# Altium PCB Copy of Testboard.PcbDoc (part 2 of 2)
Units mil, origin at the board's own origin, x right, y up, seen from the top; angles counter-clockwise.
Board outline 5500 x 5000 mil, 4 copper layers (Top layer, Inner Layer 1, Inner Layer 2, Bottom Layer), stack 13.956 mil thick; 71 components, 75 nets, 1162 pads, 400 vias.
Unrouted connection lines stored in the file: 379.
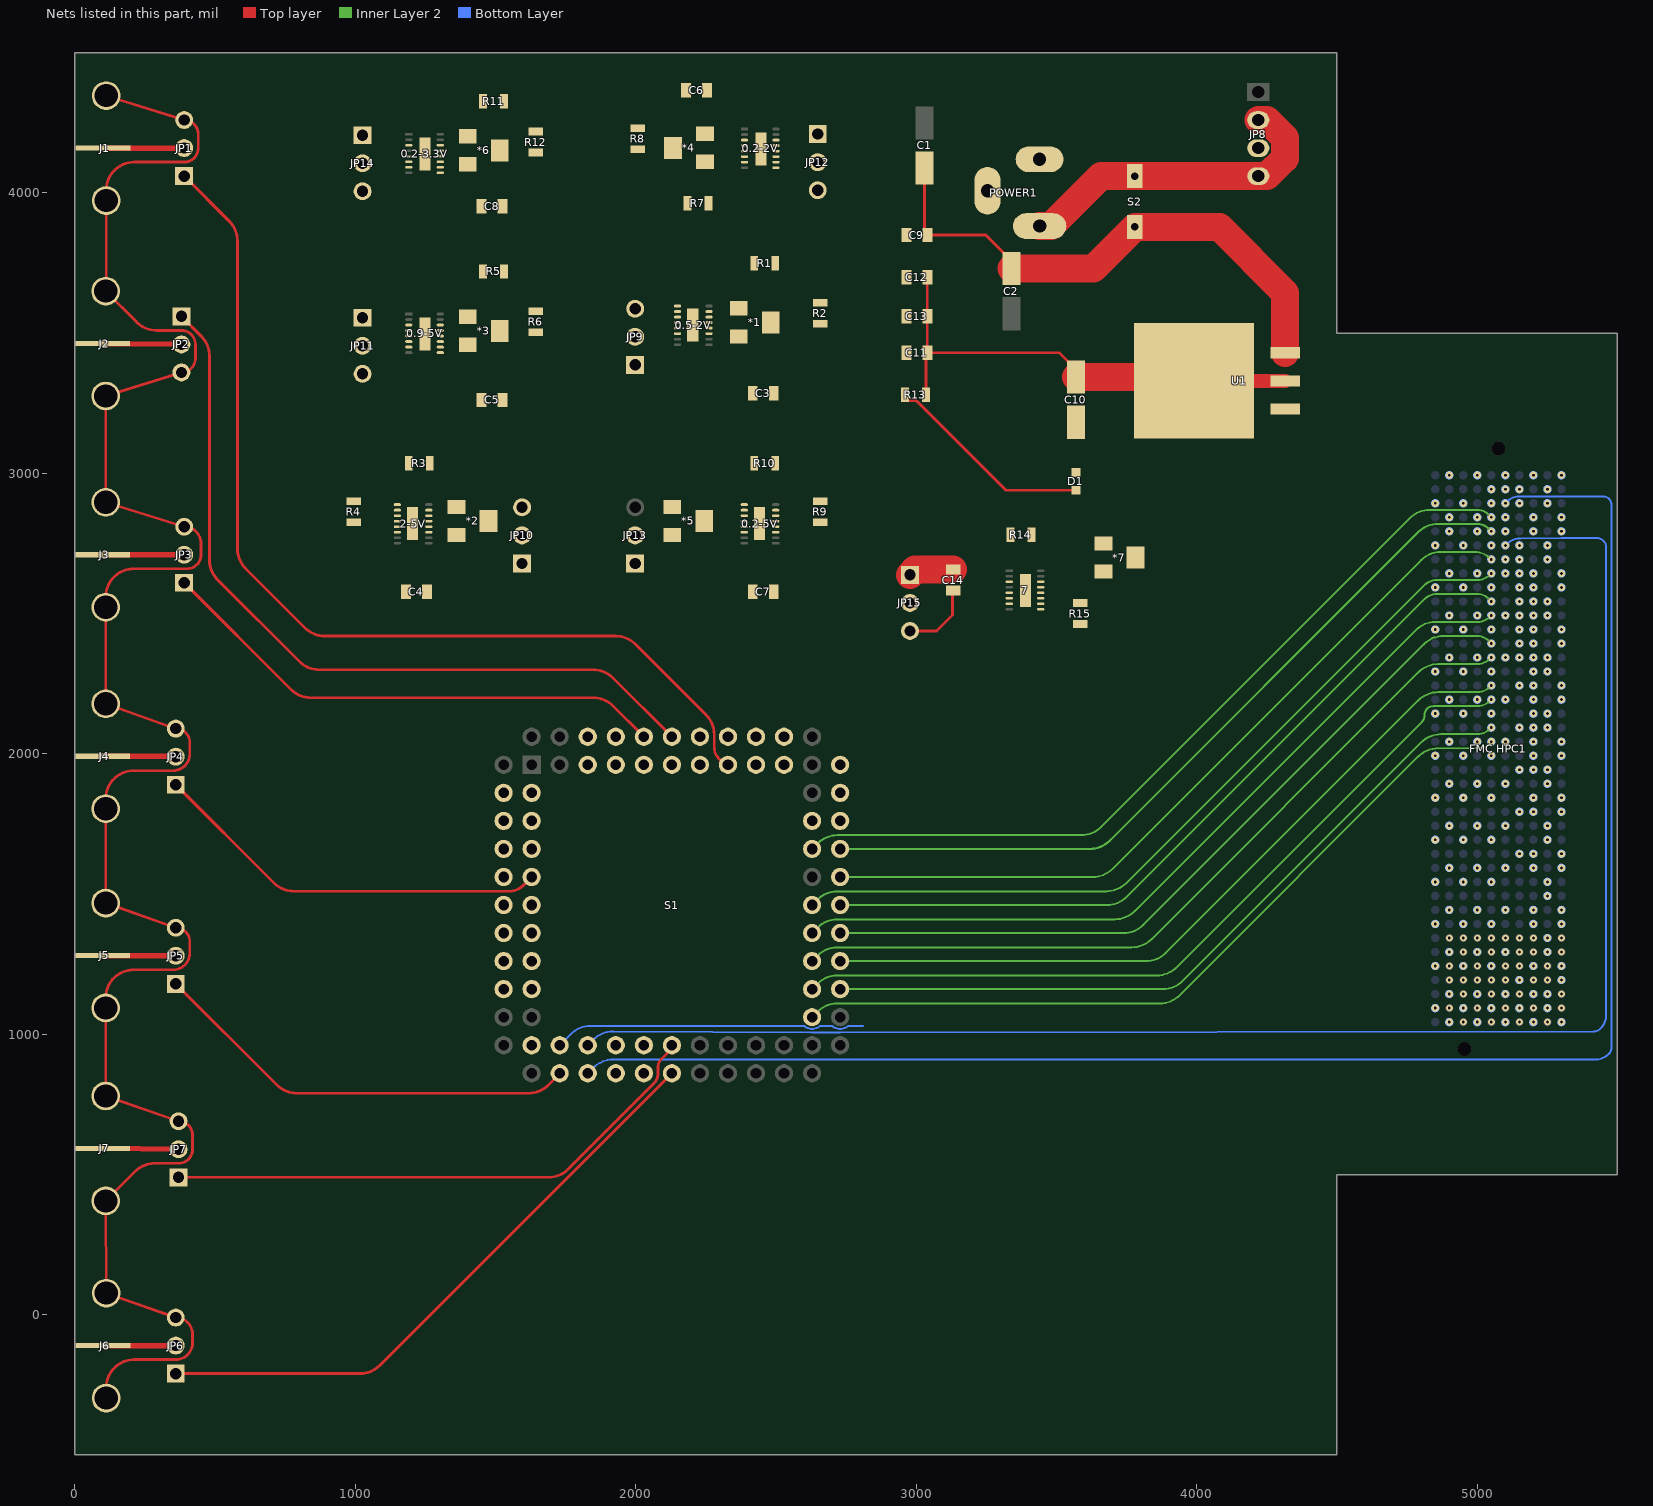
[diagram p3: the nets of this part, all layers, seen from the top]

## Part data
0.2-2V 0.2-3.3V 0.2-5V 0.5-2V 0.9-5V 2-5V 7: library part LT3022, "Linear Voltage Regulator IC Positive Adjustable 1 Output 1A 16-DFN (5x3)"
C1 C2 C10: library part CAP-10uF, "CAP ALUM 100UF 20% 10V SMD", ESR (Equivalent Series Resistance)=-, Lifetime @ Temp.="1000 Hrs @ 85°C", Manufacturer="Panasonic Electronic Components", Manufacturer Part Number=EEE-1AA101WR, Operating Temperature="-40°C ~ 85°C", Package / Case="Radial, Can - SMD", Ratings=AEC-Q200, Supplier Part Number 1=PCE3867CT-ND, Tolerance=±20%, Applications=Automotive, Category=Capacitors, ComponentLink1Description=https://industrial.panasonic.com/cdbs/www-data/pdf/RDE0000/ABA0000C1145.pdf, ComponentLink1URL=https://industrial.panasonic.com/cdbs/www-data/pdf/RDE0000/ABA0000C1145.pdf, Height - Seated (Max)="0.213\" (5.40mm)", Lead Spacing=-, Mounting Type="Surface Mount", Packaging="Cut Tape (CT)", Part Status=Active, Polarization=Polar, Pricing 1="1=0.31, 10=0.212, 100=0.1272, 500=0.09538 (USD)", RoHS="RoHS Compliant", Size / Dimension="0.197\" Dia (5.00mm)", Stock 1=89696, Supplier 1=Digi-Key, Surface Mount Land Size="0.209\" L x 0.209\" W (5.30mm x 5.30mm)"
C3 C4 C5 C6 C7 C8 C14: library part "Cap 10uF", "Cap 10uF", Capacitance=10nF, Case Code (Imperial)=0805, Case Code (Metric)=2012, Dielectric Material=Ceramic, Manufacturer="Taiyo Yuden", Manufacturer Part Number=UMK212SD103KD-T, Max Operating Temperature=125°C, Min Operating Temperature=-55°C, Package Quantity=1, Supplier Part Number 1=587-1114-1-ND, Tolerance=10%, Voltage Rating=50V, Case/Package=0805, ComponentLink1Description=https://datasheet.ciiva.com/138/umk212sd103kd-t-ss-138661.pdf, ComponentLink1URL=https://datasheet.ciiva.com/138/umk212sd103kd-t-ss-138661.pdf, ComponentLink2Description=https://datasheet.ciiva.com/138/mlcc07-e-138662.pdf, ComponentLink2URL=https://datasheet.ciiva.com/138/mlcc07-e-138662.pdf, ComponentLink3Description=https://datasheet.ciiva.com/138/mlcc07-e-138663.pdf, ComponentLink3URL=https://datasheet.ciiva.com/138/mlcc07-e-138663.pdf, ComponentLink4Description=https://datasheet.ciiva.com/30140/303umk212sd103kd-t-30140925.pdf, ComponentLink4URL=https://datasheet.ciiva.com/30140/303umk212sd103kd-t-30140925.pdf, Depth=1.25mm, Halogen Free="Halogen Free", Height=0.85mm, Lead Free="Lead Free", Length=2mm, Mount="Surface Mount", Number of Pins=2, Packaging="Tape and Reel", Pricing 1="1=0.47, 10=0.323, 100=0.1941, 500=0.1455, 1000=0.1229 (USD)", Radiation Hardening=No, Stock 1=14125, Supplier 1=Digi-Key, Termination=SMD/SMT, Thickness=0.037inch, Voltage Rating (DC)=50V, Width=0.049inch
C9 C11 C12 C13: library part UMK212SD103KD-T, "CAP 10nF 50V RF", Capacitance=10nF, Case Code (Imperial)=0805, Case Code (Metric)=2012, Dielectric Material=Ceramic, Manufacturer="Taiyo Yuden", Max Operating Temperature=125°C, Min Operating Temperature=-55°C, Package Quantity=1, Supplier Part Number 1=587-1114-1-ND, Tolerance=10%, Voltage Rating=50V, Case/Package=0805, ComponentLink1Description=https://datasheet.ciiva.com/138/umk212sd103kd-t-ss-138661.pdf, ComponentLink1URL=https://datasheet.ciiva.com/138/umk212sd103kd-t-ss-138661.pdf, ComponentLink2Description=https://datasheet.ciiva.com/138/mlcc07-e-138662.pdf, ComponentLink2URL=https://datasheet.ciiva.com/138/mlcc07-e-138662.pdf, ComponentLink3Description=https://datasheet.ciiva.com/138/mlcc07-e-138663.pdf, ComponentLink3URL=https://datasheet.ciiva.com/138/mlcc07-e-138663.pdf, ComponentLink4Description=https://datasheet.ciiva.com/30140/303umk212sd103kd-t-30140925.pdf, ComponentLink4URL=https://datasheet.ciiva.com/30140/303umk212sd103kd-t-30140925.pdf, Depth=1.25mm, Halogen Free="Halogen Free", Height=0.85mm, Lead Free="Lead Free", Length=2mm, Manufacturer Part Number=UMK212SD103KD-T, Mount="Surface Mount", Number of Pins=2, Packaging="Tape and Reel", Pricing 1="1=0.47, 10=0.323, 100=0.1941, 500=0.1455, 1000=0.1229 (USD)", Radiation Hardening=No, Stock 1=14125, Supplier 1=Digi-Key, Termination=SMD/SMT, Thickness=0.037inch, Voltage Rating (DC)=50V, Width=0.049inch
D1: library part "LG L29K-G2J1-24-Z", "LED GREEN DIFFUSED 0603 SMD", Current - Test=2mA, Lens Color=White, Manufacturer="OSRAM Opto Semiconductors Inc.", Millicandela Rating=3.92mcd, Package / Case="0603 (1608 Metric)", Supplier Device Package=0603, Supplier Part Number 1=475-2709-1-ND, Voltage - Forward (Vf) (Typ)=1.7V, Category=Optoelectronics, Color=Green, ComponentLink1Description=http://www.osram-os.com/Graphics/XPic0/00167682_0.pdf, ComponentLink1URL=http://www.osram-os.com/Graphics/XPic0/00167682_0.pdf, Features=-, Height (Max)=0.65mm, Lens Style/Size="Rectangle with Flat Top, 1.30mm x 0.80mm", Lens Transparency=Diffused, Manufacturer Part Number="LG L29K-G2J1-24-Z", Mounting Type="Surface Mount", Packaging="Cut Tape (CT)", Part Status=Active, Pricing 1="1=0.47, 10=0.339, 25=0.2768, 100=0.2215, 250=0.18688, 500=0.15918, 1000=0.12458, 2500=0.1142 (USD)", RoHS="RoHS Compliant", Size / Dimension="1.70mm L x 0.80mm W", Stock 1=0, Supplier 1=Digi-Key, Viewing Angle=160°, Wavelength - Dominant=570nm, Wavelength - Peak=572nm
J1 J2 J3 J4 J5 J6 J7: "SMA Right Angle Jack, Edge Mount Screw On, Heavy Duty, Up to 18 GHz, -65 to 165 degC", PartNumber=32K243-40ML5, ComponentLink1Description="Manufacturer URL", ComponentLink1URL=http://www.rosenberger.de, ComponentLink2Description=Datasheet, ComponentLink2URL=http://rosenberger.de/ok/images/documents/db/32K243-40ML5.pdf, ComponentLink3Description="Package Specification", ComponentLink3URL=http://rosenberger.de/ok/images/documents/db/32K243-40ML5.pdf, ComponentLink4Description="Series Overview / Design Note", ComponentLink4URL=http://rosenberger.de/ok/images/documents/spez/32.pdf, ComponentLink5Description="Webshop / RFQ", ComponentLink5URL=http://www.rosenberger.com/en/contact/sales/, DatasheetVersion=c00, Design Note="Footprint in library is a generic example - only application specific footprint delivers High Performance", Mounting Technology="Surface Mount", PackageDescription="SMA Right Angle Jack, Edge Mount Screw On, 14.50 x 14.00 x 5.15 mm", PackageReference=32K243-40ML5, PackageVersion=c00
JP1 JP2 JP3 JP4 JP5 JP6 JP7 JP9 JP10 JP11 JP12 JP13 JP14 JP15: library part Jumper-01x03, "01X03 generic terminal connector"
JP8: library part 68000-204HLF, "B.II CONN HEADER 4POS .100 STR 15AU", Colour=Black, Current Rating=3A, Flammability Rating="UL94 V-0", Insulation Resistance=5GR, Manufacturer="Amphenol FCI", Max Operating Temperature=125°C, Max Voltage Rating (AC)=1.5kV, Min Operating Temperature=-65°C, Package Quantity=100, Supplier Part Number 1=609-3255-ND, ComponentLink1Description=https://datasheet.ciiva.com/728/68000-728901.pdf, ComponentLink1URL=https://datasheet.ciiva.com/728/68000-728901.pdf, ComponentLink2Description=https://datasheet.ciiva.com/22873/70302489-22873093.pdf, ComponentLink2URL=https://datasheet.ciiva.com/22873/70302489-22873093.pdf, ComponentLink3Description=https://datasheet.ciiva.com/10149/68000-10149835.pdf, ComponentLink3URL=https://datasheet.ciiva.com/10149/68000-10149835.pdf, ComponentLink4Description=https://datasheet.ciiva.com/5149/68000-274280-5149869.pdf, ComponentLink4URL=https://datasheet.ciiva.com/5149/68000-274280-5149869.pdf, ComponentLink5Description=https://datasheet.ciiva.com/46395/1914865-46395853.pdf, ComponentLink5URL=https://datasheet.ciiva.com/46395/1914865-46395853.pdf, Connector Type="Male Pin", Contact Gender=Male, Contact Material=Bronze, Contact Mating Length=0.23inch, Contact Plating=Nickel,Gold,GXT, Depth=2.41mm, Gender=Male, Housing Colour=Black, Housing Material=Thermoplastic, Length=10.16mm, Manufacturer Part Number=68000-204HLF, Mating Post Length=5.84mm, Mount="Through Hole", Number of Contacts=4, Number of Positions=4, Number of Rows=1, Orientation=Straight, Packaging=Bulk, Pitch=2.54mm, Pricing 1="1=0.31, 10=0.293, 100=0.2048, 500=0.1756, 1000=0.1463, 5000=0.1254, 10000=0.117 (USD)", Radiation Hardening=No, Stock 1=4921, Supplier 1=Digi-Key, Termination=Solder, Termination Post Length=2.41mm, Voltage Rating=1.5kV
POWER1: "PJ-002AH", Colour=Black, Current Rating=5A, Flammability Rating="UL94 V-0", Insulation Resistance=50MR, Manufacturer=CUI, Max Operating Temperature=85°C, Min Operating Temperature=-25°C, Package Quantity=500, Supplier Part Number 1=CP-002AH-ND, Voltage Rating=24V, ComponentLink1Description=http://www.cui.com/Product/Resource/FuturePDF/PJ-002AH.pdf, ComponentLink1URL=http://www.cui.com/Product/Resource/FuturePDF/PJ-002AH.pdf, ComponentLink2Description=http://www.cui.com/product/resource/digikeypdf/pj-002ah.pdf, ComponentLink2URL=http://www.cui.com/product/resource/digikeypdf/pj-002ah.pdf, ComponentLink3Description=http://www.mouser.com/ds/2/670/pj-002ah-516007.pdf, ComponentLink3URL=http://www.mouser.com/ds/2/670/pj-002ah-516007.pdf, Connector Type=Jack, Contact Gender=Male, Contact Material="Copper,Copper Alloy", Contact Plating=Nickel, Diameter=2.1mm, Gender=Male, Housing Colour=Black, Housing Material=Thermoplastic, Lead Free="Lead Free", Manufacturer Part Number=PJ-002AH, Mount="Through Hole", Number of Conductors=2, Orientation=Horizontal, Packaging=Bulk, Pricing 1="1=0.74, 10=0.696, 25=0.6264, 50=0.5568, 100=0.5336, 250=0.4872, 500=0.464, 1000=0.3828, 2500=0.348 (USD)", Shielding=Unshielded, Stock 1=95768, Supplier 1=Digi-Key, Termination="Through Hole"
R1 R2 R3 R4 R5 R6 R7 R8 R9 R10 R11 R12 R14 R15: library part "Res 100"
R13: library part RES
S1: library part 940-44-020-24-000000, Case/Package=PLCC, Manufacturer=Mill-Max, Max Operating Temperature=120°C, Min Operating Temperature=-40°C, Package Quantity=38, Supplier Part Number 1=ED90005-ND, Body Material=PPS, Category="IC and Component Sockets", ComponentLink1Description=https://datasheet.ciiva.com/3963/940-44-020-24-000000-3963718.pdf?src-supplier=Arrow+Electronics, ComponentLink1URL=https://datasheet.ciiva.com/3963/940-44-020-24-000000-3963718.pdf?src-supplier=Arrow+Electronics, ComponentLink2Description=https://datasheet.ciiva.com/16425/9404402024000000-16425193.pdf?src-supplier=Future+Electronics, ComponentLink2URL=https://datasheet.ciiva.com/16425/9404402024000000-16425193.pdf?src-supplier=Future+Electronics, Contact Material=Copper, Contact Plating=Tin, Contact Type="Type D", Depth=15.57mm, Housing Material=Polyphenylene, Insulation Material=Polyphenylene, Lead Free="Lead Free", Length=15.57mm, Manufacturer Part Number=940-44-020-24-000000, Mount="Through Hole", Number of Contacts=20, Number of Pins=20, Number of Positions=20, Number of Rows=4, Orientation=Straight, Packaging=Rail/Tube, Pitch=0.1inch, Pricing 1="1=1.60000, 10=1.44800, 25=1.35920, 50=1.30020, 100=1.24110, 250=1.12292, 500=1.03426, 1000=0.88650, 2500=0.82740 (USD)", RoHS=Yes, RoHS Compliant=Yes, Series=940, Stock 1=458, Supplier 1=Digi-Key, Termination=Solder, Width=15.57mm
S2: "L101011MS02Q", Contact Current Rating=2A, Current Rating=4A, Manufacturer="ITT C&K", Max Operating Temperature=65°C, Max Voltage Rating (AC)=250V, Max Voltage Rating (DC)=125V, Min Operating Temperature=-30°C, Package Quantity=1, Supplier Part Number 1=CKC5106-ND, Voltage Rating (DC)=28V, Actuator Length=5.08mm, Actuator Material=Nylon,Polyamide, ComponentLink1Description=https://datasheet.ciiva.com/17406/l-10jun14-17406600.pdf, ComponentLink1URL=https://datasheet.ciiva.com/17406/l-10jun14-17406600.pdf, ComponentLink2Description=https://datasheet.ciiva.com/18147/getdatasheetpartid-301248-18147196.pdf, ComponentLink2URL=https://datasheet.ciiva.com/18147/getdatasheetpartid-301248-18147196.pdf, ComponentLink3Description=https://datasheet.ciiva.com/2889/l-10jun14-2889869.pdf, ComponentLink3URL=https://datasheet.ciiva.com/2889/l-10jun14-2889869.pdf, Contact Material=Copper, Contact Plating=Silver, Depth=10.8mm, Electrical Life=10000Cycles, Housing Material=Nylon, Lead Free="Lead Free", Length=19.1mm, Manufacturer Part Number=L101011MS02Q, Max Current Rating=4A, Mount="Through Hole", Orientation=Straight, Packaging=Bulk, Pricing 1="1=1.65, 10=1.584, 25=1.5504, 50=1.3482, 100=1.3145, 250=1.2808, 500=1.0786, 1000=1.0112, 5000=0.9269 (USD)", Radiation Hardening=No, Stock 1=8267, Supplier 1=Digi-Key, Switch Function=On-Off, Switch Travel=3.81mm, Termination="PC Pins", Throw Configuration=SPST, Voltage Rating (AC)=125V
U1: library part LM1085-IS-5.0/NOP, "No Description Available", Manufacturer_Part_Number=LM1085IS-5.0/NOPB, Supplier Part Number 1=LM1085IS-5.0/NOPB-ND, Built_By=EMA_UL_Team, Copyright="Copyright (C) 2018 Accelerated Designs. All rights reserved", RefDes=RefDes, SourceLibrary=National_2011-09-26, Supplier 1=Digi-Key, Type=DEV, Vendor="Texas Instruments"

## Via types
v1: diameter 25, hole 10, Top layer to Bottom Layer, 399 vias
v2: diameter 25, hole 10, Top layer to Bottom Layer, tented both sides, 1 vias

## Nets (pads, with @x,y where several pads share a name; then routed paths per layer and width w, separated by ;. In a path a pad name is that pad's centre, name@x,y a point inside that pad or via, vN(x,y) a via of type N, cw(c..) or ccw(c..) an arc to the next point about the centre after c; other vN are vias at no path point)
12-5V_regulator: 0.2-2V.9 0.2-2V.12 0.2-2V.13 0.2-2V.14 0.2-3.3V.9 0.2-3.3V.12 0.2-3.3V.13 0.2-3.3V.14 0.2-5V.9 0.2-5V.12 0.2-5V.13 0.2-5V.14 0.5-2V.9 0.5-2V.12 0.5-2V.13 0.5-2V.14 0.9-5V.9 0.9-5V.12 0.9-5V.13 0.9-5V.14 2-5V.9 2-5V.12 2-5V.13 2-5V.14 7.9 7.12 7.13 7.14 C10.1 C11.1 C12.1 C13.1 R13.2 S1.62 U1.2 U1.4 | length 1755.8
  Top layer w10: R13.2@3034.8,3280 3034.8,3425 C11.1@3039.8,3430 ; C12.1@3039.8,3700 C13.1@3039.8,3560 C11.1@3039.8,3430 ; C10.1@3570,3343.94 3570,3371.5 3511.5,3430 C11.1@3039.8,3430
  Top layer w50: U1.4@3990,3330 U1.2@4316,3330
  Top layer w100: C10.1@3570,3343.94 3976.06,3343.94 U1.4@3990,3330
12V: C1.1 C2.1 C9.1 S2.2 U1.3 | length 1957.2
  Top layer w10: C1.1@3030,4088.58 3030,3859.8 C9.1@3039.8,3850 3248.27,3850 3340,3758.27 C2.1@3340,3730.71
  Top layer w100: C2.1@3340,3730.71 3631.71,3730.71 S2.2@3780,3879 4081,3879 4316,3644 U1.3@4316,3430
+3V: JP15.2 S1.32
ADC_CLK: "FMC HPC1.F4" S1.27 | length 2918.3
  Inner Layer 2 w7: S1.27@2629,1661 2648.71,1680.71 cw(c2719.42,1610) 2719.42,1710 3588.58,1710 ccw(c3588.58,1810) 3659.29,1739.29 4760.71,2840.71 cw(c4831.42,2770) 4831.42,2870 5000,2870 cw(c5000,2810.88) 5041.8,2852.68 v1(5051,2843.49)
ADC_CLK_SAMPLE: "FMC HPC1.F5" S1.26 | length 2801.9
  Inner Layer 2 w8: S1.26@2729,1661 3619.58,1661 ccw(c3619.58,1761) 3690.29,1690.29 4790.71,2790.71 cw(c4861.42,2720) 4861.42,2820 5000,2820 cw(c5000,2760.88) 5041.8,2802.68 v1(5051,2793.49)
ADC_DOUT1: "FMC HPC1.F20" S1.15 | length 2843.9
  Inner Layer 2 w7: S1.15@2650.71,1039.29 S1.15@2629,1061 2648.71,1080.71 cw(c2719.42,1010) 2719.42,1110 3868.58,1110 ccw(c3868.58,1210) 3939.29,1139.29 4790.71,1990.71 cw(c4861.42,1920) 4861.42,2020 5000,2020 ccw(c5000,2086.42) 5046.97,2039.45 v1(5051,2043.49)
ADC_DOUT2: "FMC HPC1.F19" S1.16 | length 2696.8
  Inner Layer 2 w7: S1.16@2729,1161 3879.58,1161 ccw(c3879.58,1261) 3950.29,1190.29 4800.71,2040.71 cw(c4871.42,1970) 4871.42,2070 5000,2070 ccw(c5000,2136.42) 5046.97,2089.45 v1(5051,2093.49)
ADC_DOUT3: "FMC HPC1.F17" S1.17 | length 2850.9
  Inner Layer 2 w7: S1.17@2629,1161 2648.71,1180.71 cw(c2719.42,1110) 2719.42,1210 3858.58,1210 ccw(c3858.58,1310) 3929.29,1239.29 4801.38,2111.38 ccw(c4773.81,2138.95) 4812.8,2138.95 cw(c4843.85,2138.95) 4815.71,2152.07 cw(c4843.85,2138.95) 4822.15,2161.16 cw(c4843.85,2138.95) 4843.85,2170 5000,2170 ccw(c5000,2236.42) 5046.97,2189.45 v1(5051,2193.49)
ADC_DOUT4: "FMC HPC1.F16" S1.18 | length 2717.5
  Inner Layer 2 w7: S1.18@2729,1261 3819.58,1261 ccw(c3819.58,1361) 3890.29,1290.29 4790.71,2190.71 cw(c4861.42,2120) 4861.42,2220 5000,2220 ccw(c5000,2286.42) 5046.97,2239.45 v1(5051,2243.49)
ADC_DOUT5: "FMC HPC1.F14" S1.19 | length 2854.6
  Inner Layer 2 w7: S1.19@2629,1261 2648.71,1280.71 cw(c2719.42,1210) 2719.42,1310 3768.58,1310 ccw(c3768.58,1410) 3839.29,1339.29 4790.71,2290.71 cw(c4861.42,2220) 4861.42,2320 5000,2320 ccw(c5000,2386.42) 5046.97,2339.45 v1(5051,2343.49)
ADC_DOUT6: "FMC HPC1.F13" S1.20 | length 2761
  Inner Layer 2 w7: S1.20@2729,1361 3739.58,1361 ccw(c3739.58,1461) 3810.29,1390.29 4810.71,2390.71 cw(c4881.42,2320) 4834.08,2408.08 ccw(c4830.74,2414.23) 4835.61,2409.21 cw(c4851,2393.49) 4850.79,2415.49 ccw(c4850.67,2422.49) 4852.64,2415.77 cw(c4881.42,2320) 4881.42,2420 5000,2420 cw(c5000,2360.88) 5041.8,2402.68 v1(5051,2393.49)
ADC_DOUT7: "FMC HPC1.F11" S1.21 | length 2875.3
  Inner Layer 2 w7: S1.21@2629,1361 2648.71,1380.71 cw(c2719.42,1310) 2719.42,1410 3708.58,1410 ccw(c3708.58,1510) 3779.29,1439.29 4780.71,2440.71 cw(c4851.42,2370) 4851.42,2470 5000,2470 ccw(c5000,2536.42) 5046.97,2489.45 v1(5051,2493.49)
ADC_DOUT8: "FMC HPC1.F10" S1.22 | length 2782.6
  Inner Layer 2 w7: S1.22@2729,1461 3679.58,1461 ccw(c3679.58,1561) 3750.29,1490.29 4810,2550 cw(c4858.28,2501.72) 4858.28,2570 5000,2570 cw(c5000,2510.88) 5041.8,2552.68 v1(5051,2543.49)
ADC_DOUT9: "FMC HPC1.F8" S1.23 | length 2897.4
  Inner Layer 2 w7: S1.23@2629,1461 2648.71,1480.71 cw(c2719.42,1410) 2719.42,1510 3678.58,1510 ccw(c3678.58,1610) 3749.29,1539.29 4810,2600 cw(c4858.28,2551.72) 4858.28,2620 5000,2620 ccw(c5000,2686.42) 5046.97,2639.45 v1(5051,2643.49)
ADC_DOUT10: "FMC HPC1.F7" S1.24 | length 2800.9
  Inner Layer 2 w7: S1.24@2729,1561 3629.58,1561 ccw(c3629.58,1661) 3700.29,1590.29 4800.71,2690.71 cw(c4871.42,2620) 4871.42,2720 4990,2720 cw(c4990,2636.74) 5048.87,2695.62 v1(5051,2693.49)
ADC_VIN: JP1.1 S1.40 | length 3539.2
  Top layer w10: JP1.1@390,4060 550.71,3899.29 cw(c480,3828.58) 580,3828.58 580,2731.42 ccw(c680,2731.42) 609.29,2660.71 820.71,2449.29 ccw(c891.42,2520) 891.42,2420 1928.58,2420 cw(c1928.58,2320) 1999.29,2390.71 2250.71,2139.29 cw(c2180,2068.58) 2280,2068.58 2280,2022.58 ccw(c2334.51,2022.58) 2295.96,1984.04 2311.93,1968.07 ccw(c2329,1985.14) S1.40@2329,1961
DAC_CLK_AZ_IN1: "FMC HPC1.D12" S1.70
  other v1: 5151,2443.49
DAC_CLK_DAC_IN1: "FMC HPC1.D14" S1.71
  other v1: 5151,2343.49
DAC_CLK_IN1: "FMC HPC1.E2" S1.76
  other v1: 5101,2943.49
DAC_DATAIN_IN1: "FMC HPC1.D9" S1.68
  other v1: 5151,2593.49
DAC_RST_IN1: "FMC HPC1.D11" S1.69
  other v1: 5151,2493.49
DAC_SHIFTOUT1: "FMC HPC1.E6" S1.80 | length 5736.9
  Bottom Layer w7: S1.80@1829,961 1848.71,980.71 cw(c1919.42,910) 1919.42,1010 2628.78,1006 ccw(c2629,1061) 2629,1006 2729,1006 ccw(c2729,1061) 2729.08,1006 5415.86,1010 ccw(c5415.86,1044.14) 5440,1020 ccw(c5391.72,1068.28) 5460,1068.28 5460,2740 ccw(c5435.86,2740) 5452.93,2757.07 5450,2760 ccw(c5426.2,2736.2) 5426.2,2769.86 5400.72,2769.86 ccw(c5399.34,2762.99) 5399.3,2769.99 ; v1(5101,2743.49) 5104.59,2747.08 cw(c5155.07,2696.6) 5145.05,2767.28 ccw(c5144.02,2774.21) 5145.53,2767.37 cw(c5151,2743.49) 5152.27,2767.95 ; 5152.28,2767.95 ccw(c5152.58,2774.95) 5152.76,2767.95 cw(c5155.07,2696.6) 5155.07,2767.99 5301.17,2768.99 ccw(c5301,2793.49) 5301.25,2768.99 5399.27,2769.99
DAC_SYNC_IN1: "FMC HPC1.D8" S1.67
  other v1: 5151,2643.49
DAC_TBUFFER_IN1: "FMC HPC1.E3" S1.79 | length 6026.3
  Bottom Layer w7: S1.79@1829,861 1848.71,880.71 cw(c1919.42,810) 1919.42,910 5421.72,910 ccw(c5421.72,978.28) 5470,930 ccw(c5445.86,954.14) 5480,954.14 5480,2885.86 ccw(c5445.86,2885.86) 5470,2910 ccw(c5450.72,2890.72) 5450.72,2917.99 5151,2917.99 ccw(c5151,2856.43) 5107.47,2899.96 v1(5101,2893.49)
DAC_TBUFFER_OUT1: JP7.1 S1.2 | length 2015.6
  Top layer w10: JP7.1@396.89,500 JP7.1@370,490 1688.58,490 ccw(c1688.58,590) 1759.29,519.29 2063.79,823.79 ccw(c2024.64,862.93) 2080,862.93 2080,885.86 cw(c2114.14,885.86) 2090,910 2120.51,940.51 ccw(c2100.03,961) S1.2@2129,961
DAC_TDAC_IN1: "FMC HPC1.E7" S1.78 | length 1115.5
  Bottom Layer w7: S1.78@1729,961 1768.71,1000.71 cw(c1839.42,930) 1839.42,1030 2020,1030 2560,1030 2598.1,1030 cw(c2598.06,1023) 2602.47,1028.44 ccw(c2629,1061) 2655.54,1028.45 cw(c2659.94,1023) 2659.9,1030 2698.1,1030 cw(c2698.06,1023) 2702.47,1028.44 ccw(c2729,1061) 2755.54,1028.45 cw(c2759.94,1023) 2759.9,1030 2810,1030
  other v1: 5101,2693.49
DAC_TDAC_OUT1: JP5.1 S1.77 | length 1552.3
  Top layer w10: JP5.1@360,1180 720.71,819.29 ccw(c791.42,890) 791.42,790 1618.58,790 ccw(c1618.58,890) 1689.29,819.29 1727.59,857.59 ccw(c1724.17,861) S1.77@1729,861
DAC_VREF1: JP6.1 S1.1 | length 2208.3
  Top layer w10: JP6.1@360,-210 1016.58,-210 ccw(c1016.58,-110) 1087.29,-180.71 S1.1@2129,861
GND: 0.2-2V.6 0.2-2V.7 0.2-2V.10 0.2-2V.11 0.2-3.3V.6 0.2-3.3V.7 0.2-3.3V.10 0.2-3.3V.11 0.2-5V.6 0.2-5V.7 0.2-5V.10 0.2-5V.11 0.5-2V.6 0.5-2V.7 0.5-2V.10 0.5-2V.11 0.9-5V.6 0.9-5V.7 0.9-5V.10 0.9-5V.11 2-5V.6 2-5V.7 2-5V.10 2-5V.11 7.6 7.7 7.10 7.11 "FMC HPC1.A1" "FMC HPC1.A4" "FMC HPC1.A5" "FMC HPC1.A8" "FMC HPC1.A9" "FMC HPC1.A12" "FMC HPC1.A13" "FMC HPC1.A16" "FMC HPC1.A17" "FMC HPC1.A20" "FMC HPC1.A21" "FMC HPC1.A24" "FMC HPC1.A25" "FMC HPC1.A28" "FMC HPC1.A29" "FMC HPC1.A32" "FMC HPC1.A33" "FMC HPC1.A36" "FMC HPC1.A37" "FMC HPC1.A40" "FMC HPC1.B2" "FMC HPC1.B3" "FMC HPC1.B6" "FMC HPC1.B7" "FMC HPC1.B10" "FMC HPC1.B11" "FMC HPC1.B14" "FMC HPC1.B15" "FMC HPC1.B18" "FMC HPC1.B19" "FMC HPC1.B22" "FMC HPC1.B23" "FMC HPC1.B26" "FMC HPC1.B27" "FMC HPC1.B30" "FMC HPC1.B31" "FMC HPC1.B34" "FMC HPC1.B35" "FMC HPC1.B38" "FMC HPC1.B39" "FMC HPC1.C1" "FMC HPC1.C4" "FMC HPC1.C5" "FMC HPC1.C8" "FMC HPC1.C9" "FMC HPC1.C12" "FMC HPC1.C13" "FMC HPC1.C16" "FMC HPC1.C17" "FMC HPC1.C20" "FMC HPC1.C21" "FMC HPC1.C24" "FMC HPC1.C25" "FMC HPC1.C28" "FMC HPC1.C29" "FMC HPC1.C32" "FMC HPC1.C33" "FMC HPC1.C36" "FMC HPC1.C38" "FMC HPC1.C40" "FMC HPC1.D2" "FMC HPC1.D3" "FMC HPC1.D6" "FMC HPC1.D7" "FMC HPC1.D10" "FMC HPC1.D13" "FMC HPC1.D16" "FMC HPC1.D19" "FMC HPC1.D22" "FMC HPC1.D25" "FMC HPC1.D28" "FMC HPC1.D37" "FMC HPC1.D39" "FMC HPC1.E1" "FMC HPC1.E4" "FMC HPC1.E5" "FMC HPC1.E8" "FMC HPC1.E11" "FMC HPC1.E14" "FMC HPC1.E17" "FMC HPC1.E20" "FMC HPC1.E23" "FMC HPC1.E26" "FMC HPC1.E29" "FMC HPC1.E32" "FMC HPC1.E35" "FMC HPC1.E38" "FMC HPC1.E40" "FMC HPC1.F2" "FMC HPC1.F3" "FMC HPC1.F6" "FMC HPC1.F9" "FMC HPC1.F12" "FMC HPC1.F15" "FMC HPC1.F18" "FMC HPC1.F21" "FMC HPC1.F24" "FMC HPC1.F27" "FMC HPC1.F30" "FMC HPC1.F33" "FMC HPC1.F36" "FMC HPC1.F39" "FMC HPC1.G1" "FMC HPC1.G4" "FMC HPC1.G5" "FMC HPC1.G8" "FMC HPC1.G11" "FMC HPC1.G14" "FMC HPC1.G17" "FMC HPC1.G20" "FMC HPC1.G23" "FMC HPC1.G26" "FMC HPC1.G29" "FMC HPC1.G32" "FMC HPC1.G35" "FMC HPC1.G38" "FMC HPC1.G40" "FMC HPC1.H3" "FMC HPC1.H6" "FMC HPC1.H9" "FMC HPC1.H12" "FMC HPC1.H15" "FMC HPC1.H18" "FMC HPC1.H21" "FMC HPC1.H24" "FMC HPC1.H27" "FMC HPC1.H30" "FMC HPC1.H33" "FMC HPC1.H36" "FMC HPC1.H39" "FMC HPC1.J1" "FMC HPC1.J4" "FMC HPC1.J5" "FMC HPC1.J8" "FMC HPC1.J11" "FMC HPC1.J14" "FMC HPC1.J17" "FMC HPC1.J20" "FMC HPC1.J23" "FMC HPC1.J26" "FMC HPC1.J29" "FMC HPC1.J32" "FMC HPC1.J35" "FMC HPC1.J38" "FMC HPC1.J40" "FMC HPC1.K3" "FMC HPC1.K6" "FMC HPC1.K9" "FMC HPC1.K12" "FMC HPC1.K15" "FMC HPC1.K18" "FMC HPC1.K21" "FMC HPC1.K24" "FMC HPC1.K27" "FMC HPC1.K30" "FMC HPC1.K33" "FMC HPC1.K36" "FMC HPC1.K39" C3.1 C4.1 C5.1 C6.1 C7.1 C8.1 C9.2 C10.2 C11.2 C12.2 C13.2 C14.1 D1.1 J1.MH J2.MH J3.MH J4.MH J5.MH J6.MH J7.MH JP1.3 JP2.3 JP3.3 JP4.3 JP5.3 JP6.3 JP7.3 JP8.3 JP9.3 JP10.3 JP11.3 JP12.3 JP13.2 JP14.3 JP15.3 POWER1.2 POWER1.3 R2.1 R4.1 R6.1 R8.1 R10.1 R12.1 R15.1 S1.28 S1.30 S1.58 S1.61 S1.66 U1.1 | length 8102.4
  Top layer w10: J6.MH@111.81,-297.01 111.81,-260 cw(c211.81,-260) 211.81,-160 360,-160 ccw(c360,-100) 420,-100 420,-70 ccw(c360,-70) JP6.3@360,-10 J6.MH@111.81,77.01 J7.MH@110,405.98 214.73,510.71 cw(c285.44,440) 285.44,540 370,540 ccw(c370,590) 420,590 420,640 ccw(c370,640) JP7.3@370,690 J7.MH@110,780 J5.MH@110,1093.99 110,1130 cw(c210,1130) 210,1230 350,1230 ccw(c350,1290) 410,1290 410,1330 ccw(c360,1330) JP5.3@360,1380 J5.MH@110,1468.01 J4.MH@110,1804.49 110,1840 cw(c210,1840) 210,1940 350,1940 ccw(c350,2000) 410,2000 410,2040 ccw(c360,2040) JP4.3@360,2090 J4.MH@110,2178.5 J3.MH@110.24,2522.99 110.24,2560 cw(c210.24,2560) 210.24,2660 400,2660 ccw(c400,2710) 450,2710 450,2750 ccw(c390,2750) JP3.3@390,2810 J3.MH@110.24,2897.01 110.24,3275.75 J2.MH@110,3275.98 JP2.3@380,3360 ccw(c380,3410) 430,3410 430,3460 ccw(c380,3460) 380,3510 291.42,3510 cw(c291.42,3610) 220.71,3539.29 J2.MH@110,3650 ccw(c105.63,3654.37) 111.81,3654.37 J1.MH@111.81,3972.99 111.81,4010 cw(c211.81,4010) 211.81,4110 390,4110 ccw(c390,4160) 440,4160 440,4210 ccw(c390,4210) JP1.3@390,4260 J1.MH@111.81,4347.01 ; JP15.3@2978,2438.21 3073.21,2438.21 3130,2495 3130,2579.86 C14.1@3132,2581.86
  other v1: 4901,1043.49 4951,1043.49 5001,1043.49 5051,1043.49 5101,1043.49 5151,1043.49 5201,1043.49 5251,1043.49 5301,1043.49 4851,1093.49 4901,1093.49 4951,1093.49 5001,1093.49 5051,1093.49 5101,1093.49 5151,1093.49 5201,1093.49 5251,1093.49 5301,1093.49 4901,1143.49 4951,1143.49 5001,1143.49 5051,1143.49 5101,1143.49 5151,1143.49 5201,1143.49 5251,1143.49 5301,1143.49 4901,1193.49 4951,1193.49 5001,1193.49 5051,1193.49 5101,1193.49 5151,1193.49 5201,1193.49 5251,1193.49 5301,1193.49 4851,1243.49 4901,1243.49 4951,1243.49 5001,1243.49 5051,1243.49 5101,1243.49 5151,1243.49 5201,1243.49 5251,1243.49 5301,1243.49 4901,1293.49 4951,1293.49 5001,1293.49 5051,1293.49 5101,1293.49 5151,1293.49 5201,1293.49 5251,1293.49 5301,1293.49 4901,1343.49 4951,1343.49 5001,1343.49 5051,1343.49 5101,1343.49 5151,1343.49 5201,1343.49 5251,1343.49 5301,1343.49 4851,1393.49 4951,1393.49 5051,1393.49 5201,1393.49 5301,1393.49 4901,1443.49 5001,1443.49 5101,1443.49 5201,1443.49 5301,1443.49 5251,1493.49 4851,1543.49 4951,1543.49 5051,1543.49 5251,1543.49 4901,1593.49 5001,1593.49 5101,1593.49 5201,1593.49 5301,1593.49 5151,1643.49 5201,1643.49 5301,1643.49 4851,1693.49 4951,1693.49 5051,1693.49 5251,1693.49 4901,1743.49 5001,1743.49 5101,1743.49 5251,1743.49 5151,1793.49 5201,1793.49 5301,1793.49 4851,1843.49 4951,1843.49 5051,1843.49 5201,1843.49 5301,1843.49 4901,1893.49 5001,1893.49 5101,1893.49 5251,1893.49 5151,1943.49 5251,1943.49 4851,1993.49 4951,1993.49 5051,1993.49 5201,1993.49 5301,1993.49 4901,2043.49 5001,2043.49 5101,2043.49 5201,2043.49 5301,2043.49 5151,2093.49 5251,2093.49 4851,2143.49 4951,2143.49 5051,2143.49 5251,2143.49 4901,2193.49 5001,2193.49 5101,2193.49 5201,2193.49 5301,2193.49 5151,2243.49 5201,2243.49 5301,2243.49 4851,2293.49 4951,2293.49 5051,2293.49 5251,2293.49 4901,2343.49 5001,2343.49 5101,2343.49 5251,2343.49 5151,2393.49 5201,2393.49 5301,2393.49 4851,2443.49 4951,2443.49 5051,2443.49 5201,2443.49 5301,2443.49 4901,2493.49 5001,2493.49 5101,2493.49 5251,2493.49 5151,2543.49 5251,2543.49 4851,2593.49 4951,2593.49 5051,2593.49 5201,2593.49 5301,2593.49 4901,2643.49 5001,2643.49 5101,2643.49 5201,2643.49 5301,2643.49 5151,2693.49 5251,2693.49 4851,2743.49 4951,2743.49 5051,2743.49 5151,2743.49 5251,2743.49 4901,2793.49 5001,2793.49 5101,2793.49 5201,2793.49 5301,2793.49 4901,2843.49 5001,2843.49 5101,2843.49 5201,2843.49 5301,2843.49 4851,2893.49 4951,2893.49 5051,2893.49 5151,2893.49 5251,2893.49 5051,2943.49 5151,2943.49 5251,2943.49 4901,2993.49 5001,2993.49 5101,2993.49 5201,2993.49 5301,2993.49
Net0.2-2V_3: 0.2-2V.3 0.2-2V.4 *4.3 C6.2 JP12.1
Net0.2-2V_5: 0.2-2V.5 *4.1 *4.2 R7.2
Net0.2-3.3V_3: 0.2-3.3V.3 *6.3 C8.2 JP14.1
Net0.2-3.3V_5: 0.2-3.3V.5 *6.1 *6.2 R11.2
Net0.2-5V_3: 0.2-5V.3 0.2-5V.4 *5.3 C7.2 JP13.1
Net0.2-5V_5: 0.2-5V.5 *5.1 *5.2 R9.2
Net0.5-2V_3: 0.5-2V.3 0.5-2V.4 *1.3 C3.2 JP9.1
Net0.5-2V_5: 0.5-2V.5 *1.1 *1.2 R1.2
Net0.9-5V_3: 0.9-5V.3 0.9-5V.4 *3.3 C5.2 JP11.1
Net0.9-5V_5: 0.9-5V.5 *3.1 *3.2 R5.2
Net2-5V_3: 2-5V.3 2-5V.4 *2.3 C4.2 JP10.1
Net2-5V_5: 2-5V.5 *2.1 *2.2 R3.2
Net7_3: 7.3 *7.3 C14.2 JP15.1 | length 161.6
  Top layer w100: JP15.1@2978,2638.21 2996.45,2656.66 C14.2@3132,2656.66
Net7_5: 7.5 *7.1 *7.2 R14.2
NetD1_2: D1.2 R13.1 | length 757.8
  Top layer w10: R13.1@2960,3280 2960,3268.19 2968.78,3259.41 3000.47,3259.41 3319.88,2940 D1.2@3570,2940
NetJ1_1: J1.1 JP1.2 | length 290
  Top layer w20: J1.1@100,4160 JP1.2@390,4160
NetJ2_1: J2.1 JP2.2 | length 281.8
  Top layer w20: J2.1@98.19,3462.99 JP2.2@380,3460
NetJ3_1: J3.1 JP3.2 | length 291.6
  Top layer w20: J3.1@98.43,2710 JP3.2@390,2710
NetJ4_1: J4.1 JP4.2 | length 262.4
  Top layer w20: J4.1@98.19,1991.5 98.74,1990.94 359.06,1990.94 JP4.2@360,1990
NetJ5_1: J5.1 JP5.2 | length 262.2
  Top layer w10: J5.1@98.19,1281 J5.1@98.69,1280.5 ; JP5.2@359.5,1280.5 JP5.2@360,1280
  Top layer w20: J5.1@98.69,1280.5 JP5.2@359.5,1280.5
NetJ6_1: J6.1 JP6.2 | length 260
  Top layer w20: J6.1@100,-110 JP6.2@360,-110
NetJ7_1: J7.1 JP7.2 | length 271.8
  Top layer w20: J7.1@98.19,592.99 JP7.2@370,590
NetR1_1: R1.1 R2.2
NetR3_1: R3.1 R4.2
NetR5_1: R5.1 R6.2
NetR7_1: R7.1 R8.2
NetR9_1: R9.1 R10.2
NetR11_1: R11.1 R12.2
NetR14_1: R14.1 R15.2
POWER: JP8.2 JP8.4 POWER1.1 S2.1 | length 1169.3
  Top layer w100: POWER1.1@3440.55,3881.81 3481.55,3881.81 3659.74,4060 JP8.4@4220,4060 4251.61,4060 4315.37,4123.76 4315.37,4196.24 4251.61,4260 JP8.2@4220,4260
TIA_CIN0: "FMC HPC1.C11" S1.42
  other v1: 5201,2493.49
TIA_CIN1: "FMC HPC1.C18" S1.47
  other v1: 5201,2143.49
TIA_CIN2: "FMC HPC1.C10" S1.41
  other v1: 5201,2543.49
TIA_CIN3: "FMC HPC1.C15" S1.46
  other v1: 5201,2293.49
TIA_CIN4: "FMC HPC1.C19" S1.50
  other v1: 5201,2093.49
TIA_CIN5: "FMC HPC1.C14" S1.44
  other v1: 5201,2343.49
TIA_CIN6: "FMC HPC1.C22" S1.64
  other v1: 5201,1943.49
TIA_VIN: JP2.1 S1.43 | length 2827.2
  Top layer w10: JP2.1@380,3560 450.71,3489.29 cw(c380,3418.58) 480,3418.58 480,2691.42 ccw(c580,2691.42) 509.29,2620.71 800.71,2329.29 ccw(c871.42,2400) 871.42,2300 1848.58,2300 cw(c1848.58,2200) 1919.29,2270.71 S1.43@2129,2061
TIA_VIP: JP3.1 S1.45 | length 1857.8
  Top layer w10: JP3.1@390,2610 770.34,2229.66 ccw(c841.05,2300.37) 841.05,2200.37 1848.21,2200.37 cw(c1848.21,2100.37) 1918.92,2171.08 S1.45@2029,2061
TIA_VOUT: JP4.1 S1.63 | length 1440.3
  Top layer w10: JP4.1@360,1890 710.71,1539.29 ccw(c781.42,1610) 781.42,1510 1550,1510 ccw(c1550,1577.6) 1597.8,1529.8 S1.63@1629,1561
VOUT_0.2-2V: JP12.2 S1.29 S1.35 S1.36 S1.37 S1.39 S1.48 S1.81 S1.82
VOUT_0.2V-3.3V: JP14.2 S1.83 S1.84
VOUT_0.2V-5V: S1.49 S1.56 S1.57 S1.60
VOUT_0.5V-2V: JP9.2 S1.38
VOUT_0.9V-5V: JP11.2 S1.59
VOUT_2V-5V: JP10.2 S1.65
pads on no net: 0.2-2V.1 0.2-2V.2 0.2-2V.8 0.2-2V.15 0.2-2V.16 0.2-3.3V.1 0.2-3.3V.2 0.2-3.3V.4 0.2-3.3V.8 0.2-3.3V.15 0.2-3.3V.16 0.2-5V.1 0.2-5V.2 0.2-5V.8 0.2-5V.15 0.2-5V.16 0.5-2V.1 0.5-2V.2 0.5-2V.8 0.5-2V.15 0.5-2V.16 0.9-5V.1 0.9-5V.2 0.9-5V.8 0.9-5V.15 0.9-5V.16 2-5V.1 2-5V.2 2-5V.8 2-5V.15 2-5V.16 7.1 7.2 7.4 7.8 7.15 7.16 "FMC HPC1." "FMC HPC1.A2" "FMC HPC1.A3" "FMC HPC1.A6" "FMC HPC1.A7" "FMC HPC1.A10" "FMC HPC1.A11" "FMC HPC1.A14" "FMC HPC1.A15" "FMC HPC1.A18" "FMC HPC1.A19" "FMC HPC1.A22" "FMC HPC1.A23" "FMC HPC1.A26" "FMC HPC1.A27" "FMC HPC1.A30" "FMC HPC1.A31" "FMC HPC1.A34" "FMC HPC1.A35" "FMC HPC1.A38" "FMC HPC1.A39" "FMC HPC1.B1" "FMC HPC1.B4" "FMC HPC1.B5" "FMC HPC1.B8" "FMC HPC1.B9" "FMC HPC1.B12" "FMC HPC1.B13" "FMC HPC1.B16" "FMC HPC1.B17" "FMC HPC1.B20" "FMC HPC1.B21" "FMC HPC1.B24" "FMC HPC1.B25" "FMC HPC1.B28" "FMC HPC1.B29" "FMC HPC1.B32" "FMC HPC1.B33" "FMC HPC1.B36" "FMC HPC1.B37" "FMC HPC1.B40" "FMC HPC1.C2" "FMC HPC1.C3" "FMC HPC1.C6" "FMC HPC1.C7" "FMC HPC1.C23" "FMC HPC1.C26" "FMC HPC1.C27" "FMC HPC1.C30" "FMC HPC1.C31" "FMC HPC1.C34" "FMC HPC1.C35" "FMC HPC1.C37" "FMC HPC1.C39" "FMC HPC1.D1" "FMC HPC1.D4" "FMC HPC1.D5" "FMC HPC1.D15" "FMC HPC1.D17" "FMC HPC1.D18" "FMC HPC1.D20" "FMC HPC1.D21" "FMC HPC1.D23" "FMC HPC1.D24" "FMC HPC1.D26" "FMC HPC1.D27" "FMC HPC1.D29" "FMC HPC1.D30" "FMC HPC1.D31" "FMC HPC1.D32" "FMC HPC1.D33" "FMC HPC1.D34" "FMC HPC1.D35" "FMC HPC1.D36" "FMC HPC1.D38" "FMC HPC1.D40" "FMC HPC1.E9" "FMC HPC1.E10" "FMC HPC1.E12" "FMC HPC1.E13" "FMC HPC1.E15" "FMC HPC1.E16" "FMC HPC1.E18" "FMC HPC1.E19" "FMC HPC1.E21" "FMC HPC1.E22" "FMC HPC1.E24" "FMC HPC1.E25" "FMC HPC1.E27" "FMC HPC1.E28" "FMC HPC1.E30" "FMC HPC1.E31" "FMC HPC1.E33" "FMC HPC1.E34" "FMC HPC1.E36" "FMC HPC1.E37" "FMC HPC1.E39" "FMC HPC1.F1" "FMC HPC1.F22" "FMC HPC1.F23" "FMC HPC1.F25" "FMC HPC1.F26" "FMC HPC1.F28" "FMC HPC1.F29" "FMC HPC1.F31" "FMC HPC1.F32" "FMC HPC1.F34" "FMC HPC1.F35" "FMC HPC1.F37" "FMC HPC1.F38" "FMC HPC1.F40" "FMC HPC1.G2" "FMC HPC1.G3" "FMC HPC1.G6" "FMC HPC1.G7" "FMC HPC1.G9" "FMC HPC1.G10" "FMC HPC1.G12" "FMC HPC1.G13" "FMC HPC1.G15" "FMC HPC1.G16" "FMC HPC1.G18" "FMC HPC1.G19" "FMC HPC1.G21" "FMC HPC1.G22" "FMC HPC1.G24" "FMC HPC1.G25" "FMC HPC1.G27" "FMC HPC1.G28" "FMC HPC1.G30" "FMC HPC1.G31" "FMC HPC1.G33" "FMC HPC1.G34" "FMC HPC1.G36" "FMC HPC1.G37" "FMC HPC1.G39" "FMC HPC1.H1" "FMC HPC1.H2" "FMC HPC1.H4" "FMC HPC1.H5" "FMC HPC1.H7" "FMC HPC1.H8" "FMC HPC1.H10" "FMC HPC1.H11" "FMC HPC1.H13" "FMC HPC1.H14" "FMC HPC1.H16" "FMC HPC1.H17" "FMC HPC1.H19" "FMC HPC1.H20" "FMC HPC1.H22" "FMC HPC1.H23" "FMC HPC1.H25" "FMC HPC1.H26" "FMC HPC1.H28" "FMC HPC1.H29" "FMC HPC1.H31" "FMC HPC1.H32" "FMC HPC1.H34" "FMC HPC1.H35" "FMC HPC1.H37" "FMC HPC1.H38" "FMC HPC1.H40" "FMC HPC1.J2" "FMC HPC1.J3" "FMC HPC1.J6" "FMC HPC1.J7" "FMC HPC1.J9" "FMC HPC1.J10" "FMC HPC1.J12" "FMC HPC1.J13" "FMC HPC1.J15" "FMC HPC1.J16" "FMC HPC1.J18" "FMC HPC1.J19" "FMC HPC1.J21" "FMC HPC1.J22" "FMC HPC1.J24" "FMC HPC1.J25" "FMC HPC1.J27" "FMC HPC1.J28" "FMC HPC1.J30" "FMC HPC1.J31" "FMC HPC1.J33" "FMC HPC1.J34" "FMC HPC1.J36" "FMC HPC1.J37" "FMC HPC1.J39" "FMC HPC1.K1" "FMC HPC1.K2" "FMC HPC1.K4" "FMC HPC1.K5" "FMC HPC1.K7" "FMC HPC1.K8" "FMC HPC1.K10" "FMC HPC1.K11" "FMC HPC1.K13" "FMC HPC1.K14" "FMC HPC1.K16" "FMC HPC1.K17" "FMC HPC1.K19" "FMC HPC1.K20" "FMC HPC1.K22" "FMC HPC1.K23" "FMC HPC1.K25" "FMC HPC1.K26" "FMC HPC1.K28" "FMC HPC1.K29" "FMC HPC1.K31" "FMC HPC1.K32" "FMC HPC1.K34" "FMC HPC1.K35" "FMC HPC1.K37" "FMC HPC1.K38" "FMC HPC1.K40" C1.2 C2.2 JP8.1 JP13.3 S1.3 S1.4 S1.5 S1.6 S1.7 S1.8 S1.9 S1.10 S1.11 S1.12 S1.13 S1.14 S1.25 S1.31 S1.33 S1.34 S1.51 S1.52 S1.53 S1.54 S1.55 S1.72 S1.73 S1.74 S1.75
copper on no net:
  other v1: 4851,1043.49 4851,1143.49 4851,1193.49 4851,1343.49 4901,1393.49 5001,1393.49 5101,1393.49 5151,1393.49 5251,1393.49 4851,1443.49 4951,1443.49 5051,1443.49 5151,1443.49 5251,1443.49 4851,1493.49 4901,1493.49 4951,1493.49 5001,1493.49 5051,1493.49 5101,1493.49 5151,1493.49 5201,1493.49 5301,1493.49 4901,1543.49 5001,1543.49 5101,1543.49 5151,1543.49 5201,1543.49 5301,1543.49 4851,1593.49 4951,1593.49 5051,1593.49 5151,1593.49 5251,1593.49 4851,1643.49 4901,1643.49 4951,1643.49 5001,1643.49 5051,1643.49 5101,1643.49 5251,1643.49 4901,1693.49 5001,1693.49 5101,1693.49 5151,1693.49 5201,1693.49 5301,1693.49 4851,1743.49 4951,1743.49 5051,1743.49 5151,1743.49 5201,1743.49 5301,1743.49 4851,1793.49 4901,1793.49 4951,1793.49 5001,1793.49 5051,1793.49 5101,1793.49 5251,1793.49 4901,1843.49 5001,1843.49 5101,1843.49 5151,1843.49 5251,1843.49 4851,1893.49 4951,1893.49 5051,1893.49 5151,1893.49 5201,1893.49 5301,1893.49 4851,1943.49 4901,1943.49 4951,1943.49 5001,1943.49 5051,1943.49 5101,1943.49 5301,1943.49 4901,1993.49 5001,1993.49 5101,1993.49 5151,1993.49 5251,1993.49 4851,2043.49 4951,2043.49 5151,2043.49 5251,2043.49 4851,2093.49 4901,2093.49 4951,2093.49 5001,2093.49 5101,2093.49 5301,2093.49 4901,2143.49 5001,2143.49 5101,2143.49 5151,2143.49 5301,2143.49 4851,2193.49 4951,2193.49 5151,2193.49 5251,2193.49 4851,2243.49 4901,2243.49 4951,2243.49 5001,2243.49 5101,2243.49 5251,2243.49 4901,2293.49 5001,2293.49 5101,2293.49 5151,2293.49 5301,2293.49 4851,2343.49 4951,2343.49 5301,2343.49 4851,2393.49 4901,2393.49 4951,2393.49 5001,2393.49 5101,2393.49 5251,2393.49 4901,2443.49 5001,2443.49 5101,2443.49 5251,2443.49 4851,2493.49 4951,2493.49 5301,2493.49 4851,2543.49 4901,2543.49 4951,2543.49 5001,2543.49 5101,2543.49 5301,2543.49 4901,2593.49 5001,2593.49 5101,2593.49 5251,2593.49 4851,2643.49 4951,2643.49 5251,2643.49 4851,2693.49 4901,2693.49 4951,2693.49 5001,2693.49 5201,2693.49 5301,2693.49 4901,2743.49 5001,2743.49 5201,2743.49 5301,2743.49 4851,2793.49 4951,2793.49 5151,2793.49 5251,2793.49 4851,2843.49 4951,2843.49 5151,2843.49 5251,2843.49 4901,2893.49 5001,2893.49 5201,2893.49 5301,2893.49 4851,2943.49 4901,2943.49 4951,2943.49 5001,2943.49 5201,2943.49 5301,2943.49 4851,2993.49 4951,2993.49 5051,2993.49 5151,2993.49 5251,2993.49
  other v2: 4851,1293.49

## Text inside footprints (layer, text, board x,y; h text height)
J1: Mechanical 3 "Board Edge" at -7.36,3761.61 h7.87 r90
J2: Mechanical 3 "Board Edge" at -9.18,3064.61 h7.87 r90
J3: Mechanical 3 "Board Edge" at -8.94,2311.61 h7.87 r90
J4: Mechanical 3 "Board Edge" at -9.18,1593.11 h7.87 r90
J5: Mechanical 3 "Board Edge" at -9.18,882.61 h7.87 r90
J6: Mechanical 3 "Board Edge" at -7.36,-508.39 h7.87 r90
J7: Mechanical 3 "Board Edge" at -9.17,194.61 h7.87 r90
JP8: Top Overlay "1" at 4130,4340 h39.37
S1: Top Overlay "1" at 2930,1958 h120
U1: Top Overlay "*" at 4341,3142.5 h50 r90; Mechanical 13 "*" at 4205,3217.5 h50 r90